# Altium PCB VDMEDA_Display1.PcbDoc
Units mm, origin at the board's own origin, x right, y up, seen from the top; angles counter-clockwise.
Board outline 152.4 x 101.6 mm, 2 copper layers (Top Layer, Bottom Layer); 7 components, 22 nets, 63 pads, 32 vias.
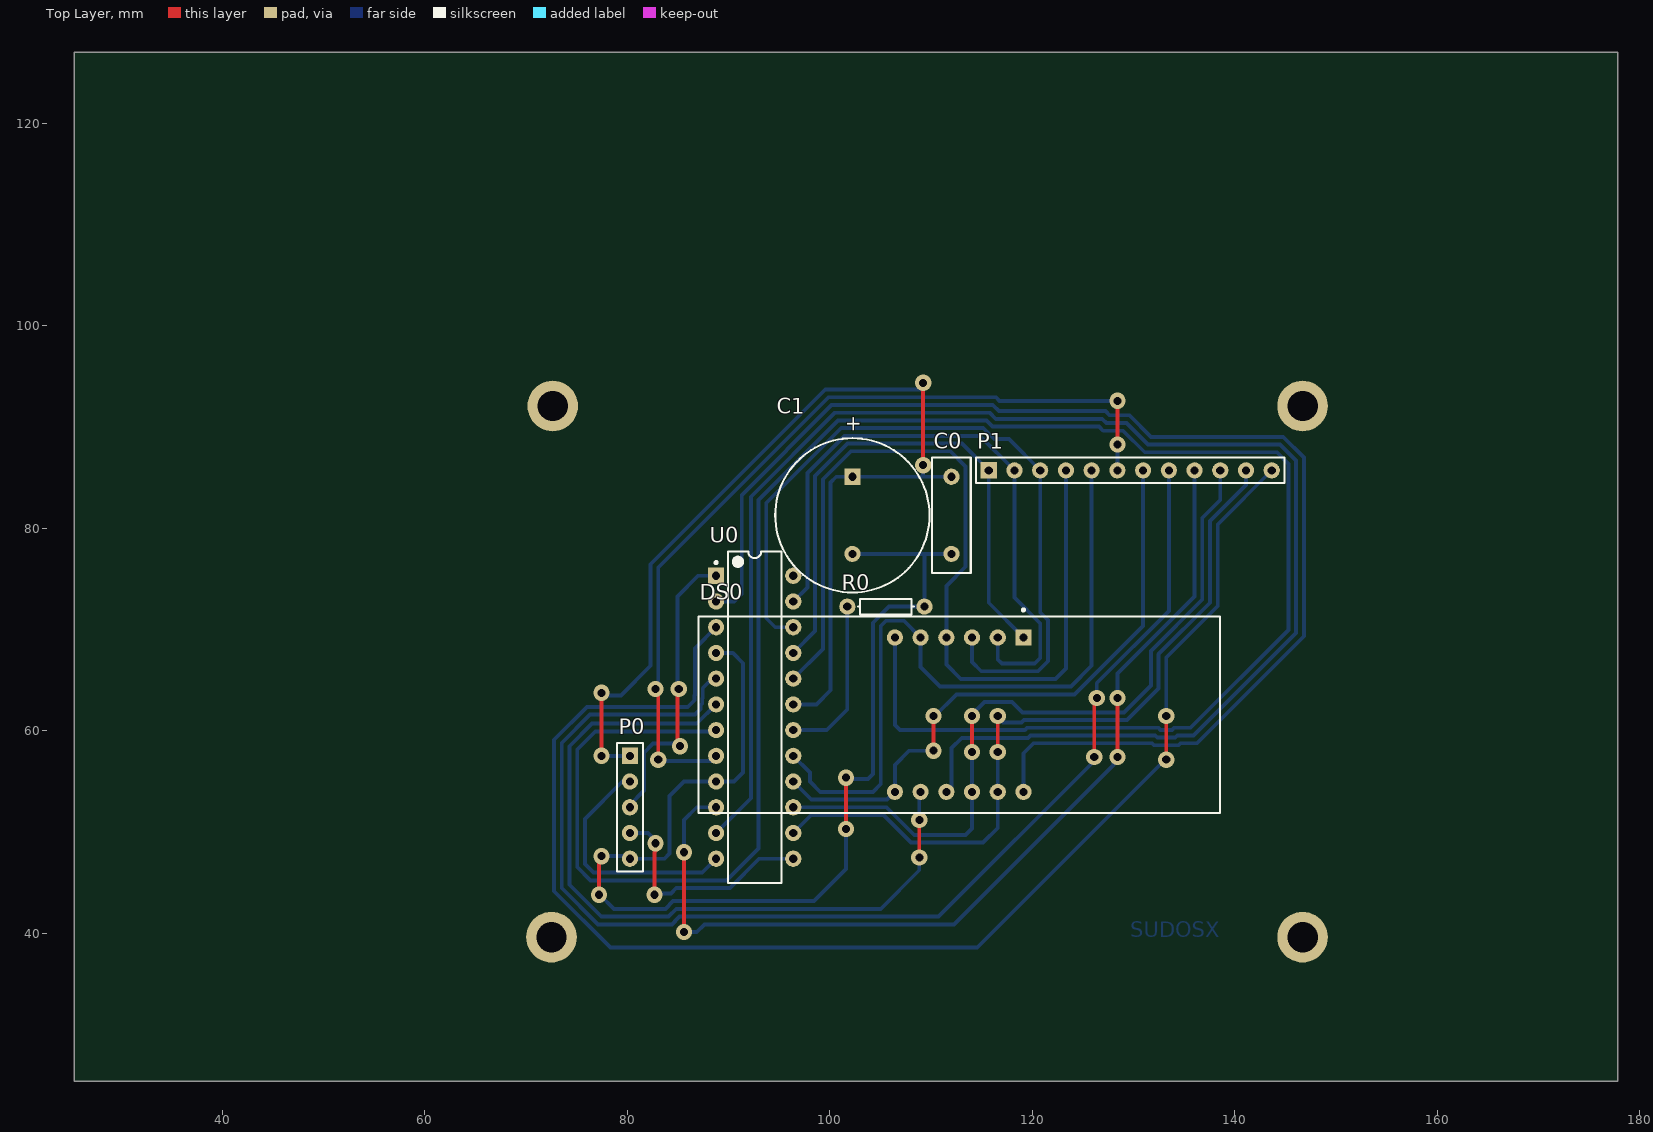
[diagram p0: Top Layer view]
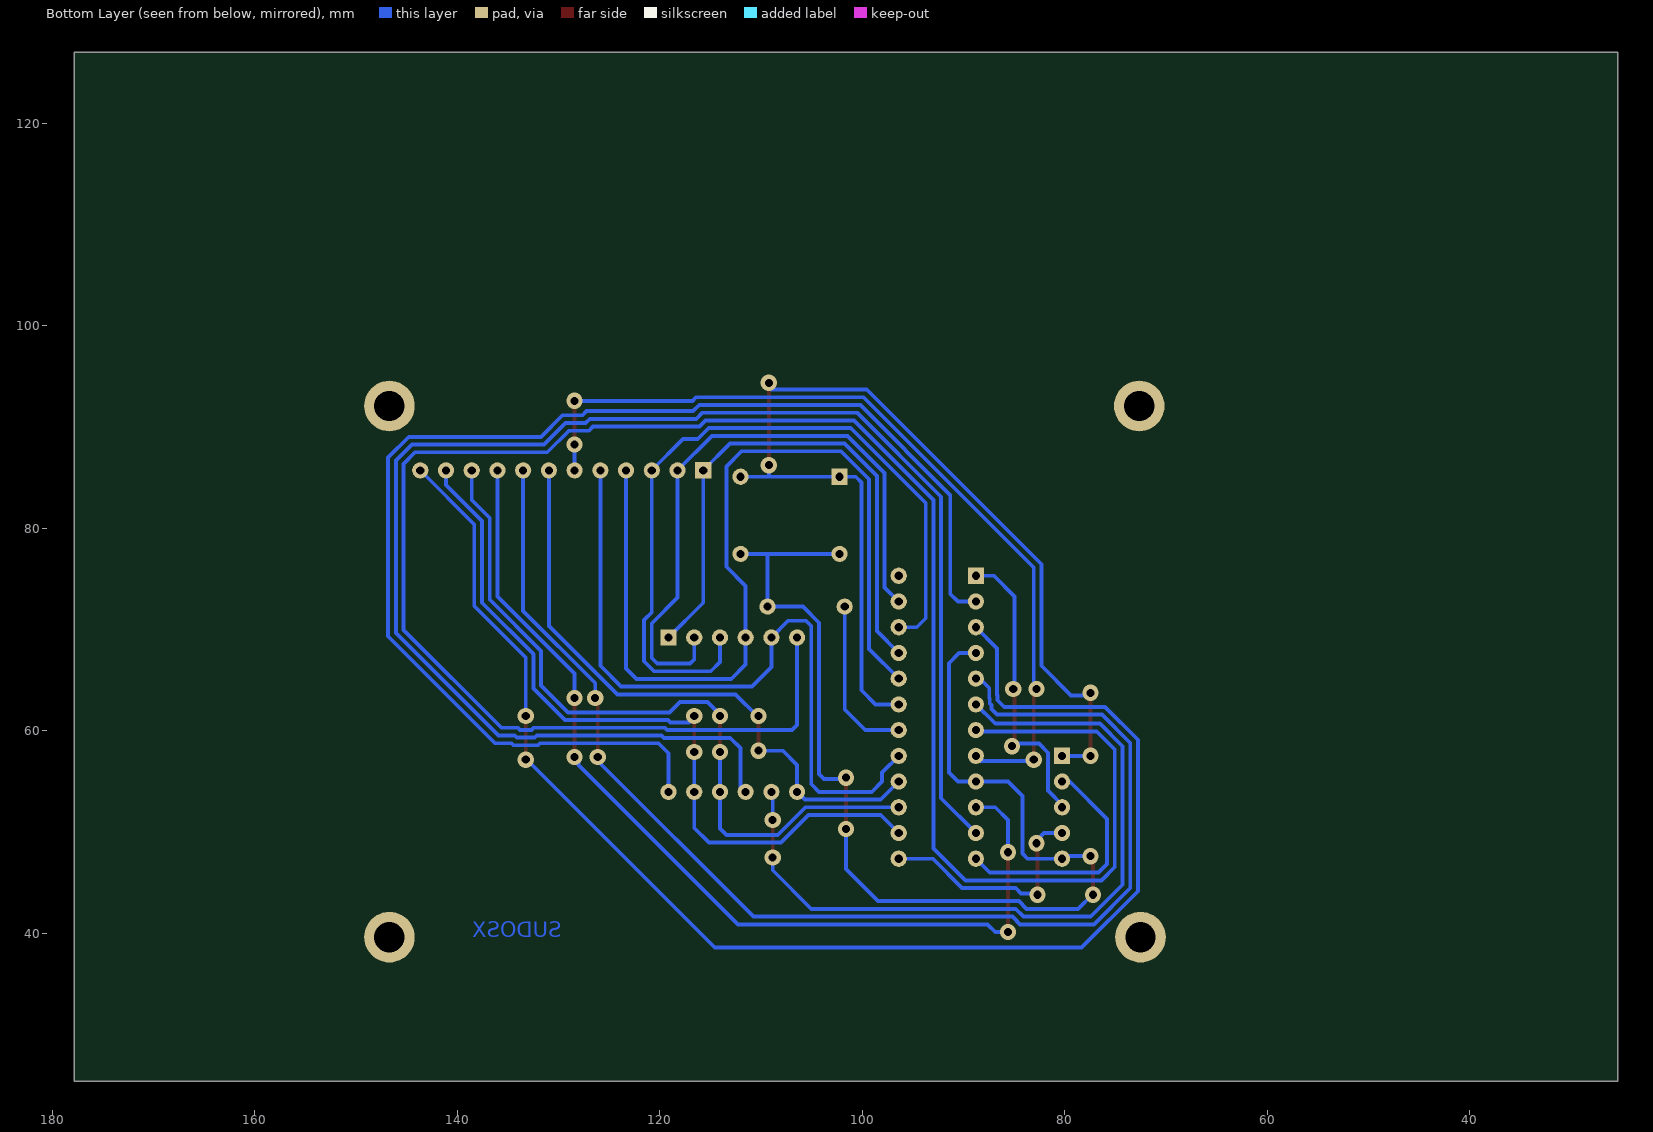
[diagram p1: Bottom Layer view, seen from below]

## Layer stack, top to bottom
Top Solder: solder mask 0.0102, Solder Resist, Dk 3.5
Top Layer: signal copper 0.0356
Dielectric 1: dielectric 0.32, FR-4, Dk 4.8
Bottom Layer: signal copper 0.0356
Bottom Solder: solder mask 0.0102, Solder Resist, Dk 3.5

## Board outline
25.4,25.4 177.8,25.4 177.8,127 25.4,127

## Design rules (kind name [scope] priority, off if disabled: settings)
Clearance [All] p1: gap=0.381
ComponentClearance [All] p1 off: gap=0.254 collisioncheckmode=3 verticalgap=0.254 showdistances=FALSE
Height [All] p1 off: minheight=0 maxheight=25.4 prefheight=12.7
PolygonConnect [All] p1: connectstyle=Relief reliefconductorwidth=0.254 reliefentries=4 polygonreliefangle="90 Angle" airgapwidth=0.254
RoomDefinition VDMEDA_Display1 [InComponentClass('VDMEDA_Display1')] p1: confinementstyle=ConfineIn formatcopy=TRUE lockcomponents=FALSE outline 68.707,36.195 150.622,36.195 150.622,95.758 68.707,95.758
RoutingVias [All] p1: holewidth=0.9 width=2.5 viastyle="Through Hole" minholewidth=0.9 minwidth=2.5 maxholewidth=0.9 maxwidth=2.5
SolderMaskExpansion [All] p1: expansion=0.102
UnpouredPolygon [All] p1: allowunpoured=FALSE
Width [All] p1: maxlimit=0.635 minlimit=0.381 preferedwidth=0.381
27 further rules are at their usual default settings.

## Components (designator, comment, footprint, x,y, rotation, side; value= is the part's Value field where it differs from the comment)
C0 "Cap" RAD-0.3 112.014,81.28 r90 top
C1 "Cap Pol1" RB7.6-15 102.235,81.28 r90 top
DS0 "HDSP-B03E" B-88 112.776,61.595 r180 top
P0 "Header 5" HDR1X5 80.264,57.531 r270 top
P1 "Header 12" HDR1X12 115.697,85.725 r0 top
R0 "Res1" AXIAL-0.3 105.537,72.263 r0 top
U0 "MAX7219CNG" NG24A 92.583,61.341 r0 top

## Footprints (in the part's own frame and the unit in brackets; to place one, negate y for a bottom-side part, rotate by r counter-clockwise, add the part's x,y. Pads: shape width x height; smd on the part's side, far side on the other; paste and mask are expansions set on the pad)
AXIAL-0.3 [mm] "Axial Device, Thru-Hole; 2 Leads; 0.3 in Pin Spacing"
  round 1.6 hole 0.8: 1(-3.81,0) 2(3.81,0)
  silkscreen extent -2.77,-0.76 2.77,0.76
B-88 [mm] "LED, 7-Segment Display, 14.22 mm, Four Digit, 88:88; 12 Leads; Row Space 15.24 mm; Pitch 2.54 mm"
  rect 1.6x1.6 hole 0.8: 1(-6.35,-7.62)
  round 1.6 hole 0.8: 2(-3.81,-7.62) 3(-1.27,-7.62) 4(1.27,-7.62) 5(3.81,-7.62) 6(6.35,-7.62) 7(6.35,7.62) 8(3.81,7.62) 9(1.27,7.62) 10(-1.27,7.62) 11(-3.81,7.62) 12(-6.35,7.62)
  silkscreen extent -25.75,-10.47 25.75,9.7
HDR1X5 [mm] "Connector; Header; 5 Position"
  rect 1.6x1.6 hole 0.8: 1(0,0)
  round 1.6 hole 0.8: 2(2.54,0) 3(5.08,0) 4(7.62,0) 5(10.16,0)
  silkscreen extent -1.27,-1.27 11.43,1.27
HDR1X12 [mm] "Connector; Header; 12 Position"
  rect 1.6x1.6 hole 0.8: 1(0,0)
  round 1.6 hole 0.8: 2(2.54,0) 3(5.08,0) 4(7.62,0) 5(10.16,0) 6(12.7,0) 7(15.24,0) 8(17.78,0) 9(20.32,0) 10(22.86,0) 11(25.4,0) 12(27.94,0)
  silkscreen extent -1.27,-1.27 29.21,1.27
NG24A [mm] "DIP, 24-Leads, Row Spacing 7.62mm, Pitch 2.54mm, Body 30.55x6.99mm"
  rect 1.6x1.6 hole 0.8: 1(-3.81,13.97)
  round 1.6 hole 0.8: 2(-3.81,11.43) 3(-3.81,8.89) 4(-3.81,6.35) 5(-3.81,3.81) 6(-3.81,1.27) 7(-3.81,-1.27) 8(-3.81,-3.81) 9(-3.81,-6.35) 10(-3.81,-8.89) 11(-3.81,-11.43) 12(-3.81,-13.97) 13(3.81,-13.97) 14(3.81,-11.43) 15(3.81,-8.89) 16(3.81,-6.35) 17(3.81,-3.81) 18(3.81,-1.27) 19(3.81,1.27) 20(3.81,3.81) 21(3.81,6.35) 22(3.81,8.89) 23(3.81,11.43) 24(3.81,13.97)
  silkscreen extent -3.93,-16.35 2.65,16.35, body extent -3.6,-16.32 3.6,16.32, height 5.08
RAD-0.3 [mm] "Radial Cap, Thru-Hole; 2 Leads; 0.3 in Pin Spacing"
  round 1.6 hole 0.8: 1(-3.81,0) 2(3.81,0)
  silkscreen extent -5.71,-1.91 5.71,1.91
RB7.6-15 [mm] "Polarized Capacitor (Radial); 2 Leads"
  rect 1.6x1.6 hole 0.8: 1(3.81,0)
  round 1.6 hole 0.8: 2(-3.81,0)
  silkscreen extent -7.62,-7.62 7.62,7.62

## Part data
C0: "Capacitor"
C1: "Polarized Capacitor (Radial)"
DS0: "14.22 mm GaP HER, Untinted, 88:88 4-Digit 7-Segment Display: CC, Gray Surface"
P0: "Header, 5-Pin"
P1: "Header, 12-Pin"
R0: "Resistor"
U0: "Serially Interfaced, 8-Digit LED Display Driver"

## Free pads (board coordinates)
  round 5 hole 3: 0(72.517,39.624) 0(72.644,92.075) 0(146.685,39.624) 0(146.685,92.075)

## Via types
v1: diameter 1.6, hole 0.8, Top Layer to Bottom Layer, 32 vias

## Nets (pads, with @x,y where several pads share a name; then routed paths per layer and width w, separated by ;. In a path a pad name is that pad's centre, name@x,y a point inside that pad or via, vN(x,y) a via of type N, cw(c..) or ccw(c..) an arc to the next point about the centre after c; other vN are vias at no path point)
5V: C0.2 C1.1 P0.1 U0.19 | length 105.9
  Top Layer w0.381: v1(77.47,57.531) v1@77.47,63.627 ; v1(109.22,86.233) v1(109.22,94.361)
  Bottom Layer w0.381: v1(77.47,57.531) P0.1 ; v1(77.47,63.754) 77.724,63.5 79.375,63.5 82.296,66.421 82.296,76.443 99.554,93.701 108.941,93.701 v1@109.22,93.98 ; U0.19 98.679,62.611 100.076,64.008 100.076,84.524 100.642,85.09 C1.1 111.76,85.09 C0.2@112.014,85.344 ; 109.22,85.217 v1(109.22,86.233) ; v1(109.22,94.361) 109.22,94.234 v1@109.474,93.98
GND: C0.1 C1.2 P0.5 R0.2 U0.4 U0.9 | length 112.7
  Top Layer w0.381: v1(77.216,43.815) 77.216,47.371 v1(77.47,47.625) ; v1@101.6,50.419 v1@101.6,55.245
  Bottom Layer w0.381: v1(77.216,43.815) 77.279,43.815 78.676,42.418 83.762,42.418 84.524,43.18 98.425,43.18 101.6,46.355 v1@101.6,50.419 ; v1(77.47,47.625) 80.01,47.625 P0.5 83.668,47.371 84.176,47.879 84.176,53.569 85.598,54.991 U0.9 90.551,54.991 91.44,55.88 91.44,66.675 90.424,67.691 U0.4 ; v1@101.6,55.245 103.759,55.245 104.267,55.753 104.267,70.674 105.856,72.263 R0.2 109.347,77.47 ; C1.2 109.347,77.47 ; C0.1 109.347,77.47
  other v1: 101.6,50.292 101.6,55.372
NetDS0_1: DS0.1 P1.1 U0.21 | length 55.9
  Bottom Layer w0.381: U0.21 98.552,69.85 98.552,85.155 101.763,88.367 113.055,88.367 P1.1 115.697,72.644 DS0.1
NetDS0_2: DS0.2 P1.2 U0.23 | length 63
  Bottom Layer w0.381: U0.23 97.79,74.168 97.79,85.471 101.448,89.129 114.833,89.129 P1.2 118.237,73.152 120.777,70.612 120.777,67.183 120.244,66.65 116.992,66.65 116.586,67.056 DS0.2
NetDS0_3: DS0.3 P1.3 U0.22 | length 76.1
  Bottom Layer w0.381: U0.22 94.615,70.231 93.726,71.12 93.726,82.485 101.132,89.891 115.149,89.891 116.238,88.801 117.701,88.801 P1.3 120.777,71.69 121.539,70.928 121.539,66.867 120.559,65.888 114.96,65.888 114.046,66.802 DS0.3
NetDS0_4: DS0.4 P1.4 U0.20 | length 89.5
  Bottom Layer w0.381: U0.20 99.314,68.072 99.314,84.84 102.079,87.605 111.912,87.605 113.411,86.106 113.411,76.2 111.506,74.295 DS0.4 111.506,66.548 112.928,65.126 122.276,65.126 123.317,66.167 P1.4
NetDS0_5: DS0.5 P1.5 U0.17 | length 72.2
  Bottom Layer w0.381: U0.17 98.044,55.88 98.044,54.991 99.06,53.975 104.267,53.975 105.029,54.737 105.029,70.358 105.537,70.866 107.315,70.866 DS0.5 108.966,66.294 110.896,64.364 123.8,64.364 125.857,66.421 P1.5
NetDS0_6: DS0.6 U0.7 | length 206
  Bottom Layer w0.381: U0.7 88.646,59.944 76.835,59.944 75.057,58.166 75.057,46.547 76.367,45.237 89.814,45.237 92.964,48.387 92.964,82.8 100.816,90.653 115.465,90.653 116.074,90.043 126.588,90.043 126.995,89.637 128.965,89.637 131.099,87.503 144.145,87.503 145.288,86.36 145.288,69.973 135.614,60.3 133.994,60.3 133.791,60.096 132.655,60.096 132.452,60.3 119.485,60.3 119.257,60.071 106.934,60.071 106.426,60.579 DS0.6
NetDS0_7: DS0.7 P1.7 U0.16 | length 61.3
  Top Layer w0.381: v1(110.236,58.039) v1(110.236,61.468)
  Bottom Layer w0.381: U0.16 98.171,53.213 105.664,53.213 DS0.7 106.426,56.642 107.823,58.039 v1(110.236,58.039) ; v1(110.236,61.468) 110.363,61.468 112.497,63.602 124.181,63.602 130.937,70.358 P1.7
NetDS0_8: DS0.8 U0.6 | length 75.4
  Top Layer w0.381: v1@108.839,47.752 v1@108.839,50.927
  Bottom Layer w0.381: U0.6 86.868,60.706 76.519,60.706 74.295,58.482 74.295,44.796 77.435,41.656 84.078,41.656 84.84,42.418 105.029,42.418 108.839,46.228 v1@108.839,47.752 ; v1@108.839,50.927 108.839,53.848 DS0.8
  other v1: 108.839,47.498 108.839,51.181
NetDS0_9: DS0.9 U0.11 | length 154.3
  Bottom Layer w0.381: U0.11 92.202,53.34 92.202,83.116 100.501,91.415 115.78,91.415 116.39,90.805 126.904,90.805 127.31,90.399 129.281,90.399 131.414,88.265 144.461,88.265 146.05,86.676 146.05,69.658 135.93,59.538 134.31,59.538 134.107,59.334 132.339,59.334 132.136,59.538 119.801,59.538 119.572,59.309 113.03,59.309 112.014,58.293 112.014,54.483 DS0.9
NetDS0_10: DS0.10 P1.10 U0.15 | length 74.1
  Top Layer w0.381: v1(114.046,57.912) v1(114.046,61.468)
  Bottom Layer w0.381: U0.15 105.609,52.451 108.339,49.721 113.411,49.721 114.046,50.355 DS0.10 v1(114.046,57.912) ; v1(114.046,61.468) 114.046,61.595 115.291,62.84 118.008,62.84 119.024,61.824 129.041,61.824 131.699,64.481 131.699,67.883 136.779,72.963 136.779,81.022 138.557,82.8 P1.10
NetDS0_11: DS0.11 P1.11 U0.14 | length 76.4
  Top Layer w0.381: v1(116.586,57.912) v1(116.586,61.468)
  Bottom Layer w0.381: U0.14 98.171,51.689 105.293,51.689 108.024,48.959 115.126,48.959 116.586,50.419 DS0.11 v1(116.586,57.912) ; v1(116.586,61.468) 116.586,61.341 117.094,60.833 118.941,60.833 119.17,61.062 129.357,61.062 132.461,64.166 132.461,67.568 137.541,72.648 137.541,80.707 141.097,84.263 P1.11
NetDS0_12: DS0.12 U0.2 | length 128
  Bottom Layer w0.381: U0.2 90.551,72.771 91.313,73.533 91.313,83.305 100.185,92.177 116.096,92.177 116.706,91.567 127.219,91.567 127.626,91.161 129.596,91.161 131.73,89.027 144.776,89.027 146.812,86.991 146.812,69.342 136.246,58.776 134.625,58.776 134.422,58.572 132.024,58.572 131.821,58.776 120.117,58.776 119.126,57.785 DS0.12
NetP0_2: P0.2 U0.12 | length 23.5
  Bottom Layer w0.381: P0.2@79.502,54.991 75.819,51.308 75.819,46.863 76.683,45.999 87.401,45.999 U0.12
NetP0_3: P0.3 U0.1 | length 28.8
  Top Layer w0.381: v1@84.836,58.737 84.963,58.864 v1@84.963,63.627
  Bottom Layer w0.381: P0.3 80.264,52.705 81.661,54.102 81.661,57.84 82.558,58.737 v1@84.836,58.737 ; v1@84.963,63.627 84.963,73.279 86.995,75.311 U0.1
  other v1: 85.217,58.483 85.09,64.135
NetP0_4: P0.4 U0.13 | length 22.9
  Top Layer w0.381: v1@82.677,44.069 82.677,48.006 83.058,48.387 v1@82.804,48.641
  Bottom Layer w0.381: P0.4 82.042,49.911 v1@82.804,49.149 ; v1(82.677,43.815) 82.804,43.942 84.303,43.942 84.836,44.475 90.13,44.475 93.026,47.371 U0.13
  other v1: 82.804,48.895
NetP1_6: P1.6 U0.8 | length 84.3
  Top Layer w0.381: v1@83.058,57.531 v1@83.058,63.627 ; v1(128.397,88.265) v1(128.397,92.583)
  Bottom Layer w0.381: v1@83.058,57.531 83.566,57.023 88.773,57.023 U0.8 ; v1@83.058,63.627 83.058,76.127 99.869,92.939 116.412,92.939 116.767,92.583 v1(128.397,92.583) ; P1.6 v1(128.397,88.265)
  other v1: 83.058,57.15 82.804,64.135
NetP1_8: P1.8 U0.5 | length 125.8
  Top Layer w0.381: v1(126.111,57.404) 126.111,62.865 126.365,63.119 v1(126.365,63.246)
  Bottom Layer w0.381: U0.5 88.392,65.151 87.451,64.21 87.451,63.229 87.401,63.179 87.401,62.702 87.249,62.549 87.249,62.165 86.679,61.595 76.331,61.595 73.533,58.797 73.533,44.481 77.12,40.894 84.42,40.894 84.709,41.183 84.709,41.21 85.155,41.656 110.744,41.656 126.111,57.023 v1(126.111,57.404) ; v1(126.365,63.246) 126.365,64.705 133.477,71.817 P1.8
NetP1_9: P1.9 U0.10 | length 96.6
  Top Layer w0.381: v1(85.598,40.132) v1(85.598,48.006) ; v1@128.27,57.277 v1(128.397,57.404) v1(128.397,63.246)
  Bottom Layer w0.381: v1(85.598,40.132) 86.868,40.132 87.63,40.894 112.268,40.894 128.016,56.642 128.016,57.277 v1@128.27,57.277 ; v1(85.598,48.006) 85.598,51.181 86.868,52.451 U0.10 ; v1(128.397,63.246) 128.397,65.659 136.017,73.279 P1.9
NetP1_12: P1.12 U0.3 | length 141.9
  Top Layer w0.381: v1(133.223,57.15) v1(133.223,61.468)
  Bottom Layer w0.381: U0.3 86.689,68.147 86.689,63.545 86.639,63.495 86.639,63.017 85.979,62.357 76.015,62.357 72.771,59.113 72.771,44.165 78.328,38.608 114.554,38.608 133.096,57.15 v1(133.223,57.15) ; v1(133.223,61.468) 133.223,67.252 138.303,72.332 138.303,80.391 P1.12
NetR0_1: R0.1 U0.18 | length 16.3
  Bottom Layer w0.381: U0.18 99.695,60.071 101.727,62.103 R0.1
pads on no net: U0.24

## Other copper
Bottom Layer:
  text "SUDOSX" at 129.667,39.624 h1.52

## Silkscreen, mask and mechanical layers (free items; w line width, h text height)
Mechanical 15:
  lines w0.254: 68.58,95.758 68.58,36.195 150.495,36.195 150.495,95.885 68.707,95.885

## Text inside footprints (layer, text, board x,y; h text height)
C1: Top Overlay "+" at 102.972,89.412 h1.5 r90